# EAGLE board driver ckt_4_HC (EAGLE 8.4.3)
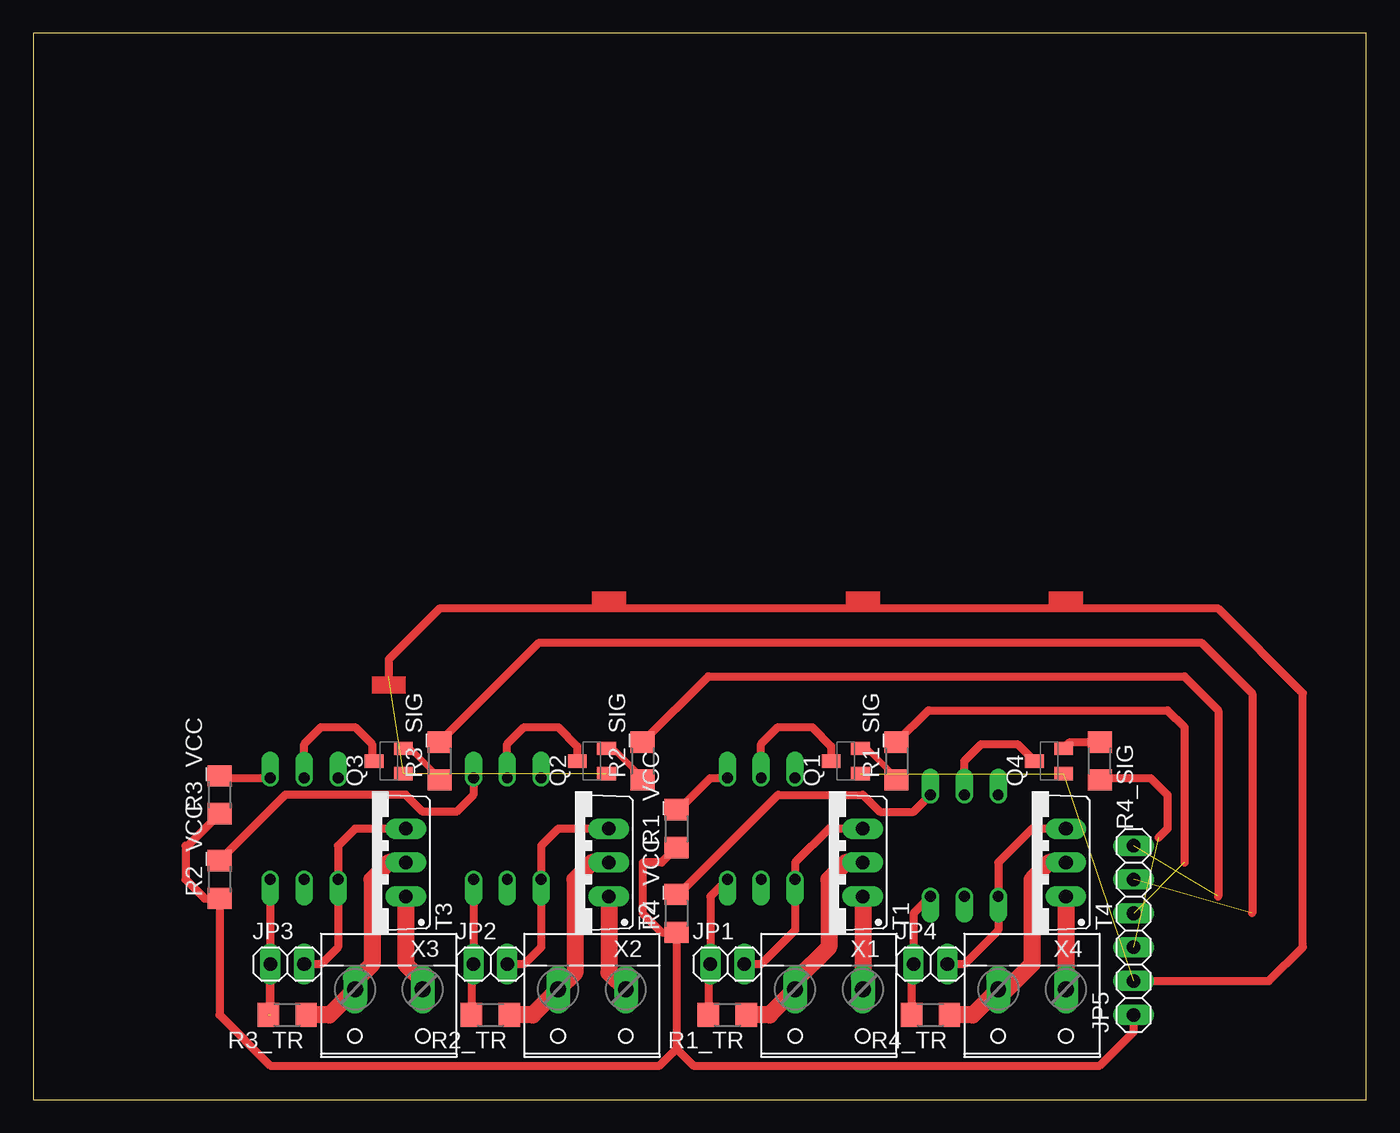
[diagram p0: board, top side]
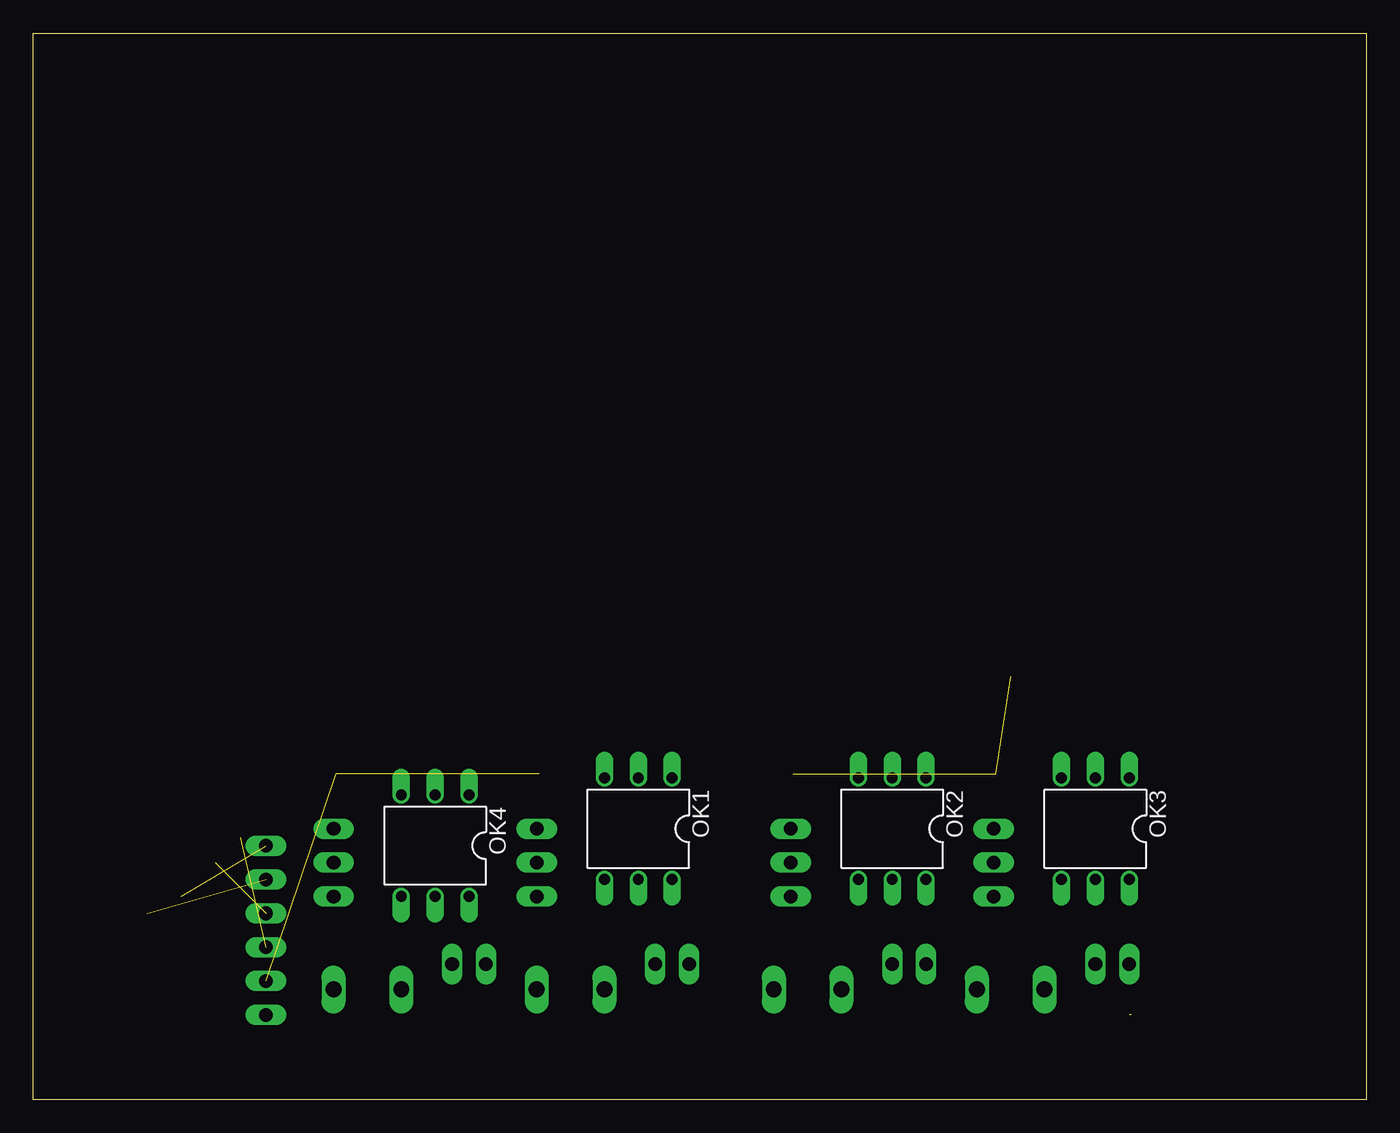
[diagram p1: board, bottom side, seen from below]

Size 100 x 80 mm. Coordinates in mm from the lower left corner, seen from the top.
Outline: 0,0 100,0 100,80 0,80 0,0
Copper layers (1*16): Top 0.035mm / dielectric 1.5mm / Bottom 0.035mm
Design rules "default": minimum track width 6mil, minimum drill 0.35mm, track to track 6mil, track to pad 6mil, pad to pad 6mil, via to via 6mil, smd to smd 6mil, copper to edge 40mil, drill to drill 6mil, minimum pad ring 10mil, minimum via ring 8mil, stop-mask expansion 4mil, vias tented up to drill 0mil, thermal gap 10mil

## Footprints (pad centres in the part's own frame; a part is rotated, then mirrored left to right if it is on the bottom)
1X02 = drill 1.016 long: 1 -1.27,0; 2 1.27,0
1X06 = drill 1.016 long: 1 -6.35,0; 2 -3.81,0; 3 -1.27,0; 4 1.27,0; 5 3.81,0; 6 6.35,0
DIL06 = drill 0.813 offset: 1 -2.54,-3.81; 2 0,-3.81; 3 2.54,-3.81; 4 2.54,3.81; 5 0,3.81; 6 -2.54,3.81
SOT23-EBC = smd 1 x 1.4: B 0.95,-1.1; C 0,1.1; E -0.95,-1.1
R1206 = smd 1.6 x 1.803: 1 -1.422,0; 2 1.422,0
TO220BV = drill 1.016 long: G 2.54,-2.54; T1 -2.54,-2.54; T2 0,-2.54
W237-132 = drill 1.194 long: 1 -2.54,-0.635; 2 2.54,-0.635

## Placement (x,y rotation side)
JP1  [1X02]  52.07,10.16 0 top
JP2  [1X02]  34.29,10.16 0 top
JP3  [1X02]  19.05,10.16 0 top
JP4  [1X02]  67.31,10.16 0 top
JP5  [1X06]  82.55,12.7 90 top
OK1  MOC3021M  [DIL06]  54.61,20.32 180 bottom
OK2  MOC3021M  [DIL06]  35.56,20.32 180 bottom
OK3  MOC3021M  [DIL06]  20.32,20.32 180 bottom
OK4  MOC3021M  [DIL06]  69.85,19.05 180 bottom
Q1  [SOT23-EBC]  60.96,25.4 90 top
Q2  [SOT23-EBC]  41.91,25.4 90 top
Q3  [SOT23-EBC]  26.67,25.4 90 top
Q4  [SOT23-EBC]  76.2,25.4 90 top
R1_SIG  [R1206]  64.77,25.4 90 top
R1_TR  [R1206]  52.07,6.35 180 top
R1_VCC  [R1206]  48.26,20.32 90 top
R2_SIG  [R1206]  45.72,25.4 90 top
R2_TR  [R1206]  34.29,6.35 180 top
R2_VCC  [R1206]  13.97,16.51 90 top
R3_SIG  [R1206]  30.48,25.4 90 top
R3_TR  [R1206]  19.05,6.35 180 top
R3_VCC  [R1206]  13.97,22.86 90 top
R4_SIG  [R1206]  80.01,25.4 270 top
R4_TR  [R1206]  67.31,6.35 180 top
R4_VCC  [R1206]  48.26,13.97 90 top
T1  BT138-V  [TO220BV]  59.69,17.78 90 top
T2  BT138-V  [TO220BV]  40.64,17.78 90 top
T3  BT138-V  [TO220BV]  25.4,17.78 90 top
T4  BT138-V  [TO220BV]  74.93,17.78 90 top
X1  [W237-132]  59.69,7.62 180 top
X2  [W237-132]  41.91,7.62 180 top
X3  [W237-132]  26.67,7.62 180 top
X4  [W237-132]  74.93,7.62 180 top

## Library data of the parts
JP1-JP5 = pinhead
OK1-OK4 = optocoupler; MF: FAIRCHILD SEMICONDUCTOR; MPN: MOC3021-M; OC_FARNELL: 1021365; OC_NEWARK: 95B7895
Q1-Q4 = transistor
R1_SIG R1_TR R1_VCC R2_SIG R2_TR R2_VCC R3_SIG R3_TR R3_VCC R4_SIG R4_TR R4_VCC = eagle-ltspice; SPICEMODEL: NONE; SPICEPREFIX: R
T1-T4 = triac
X1-X4 = con-wago-508; OC_FARNELL: unknown; OC_NEWARK: unknown

## Nets
+5V: JP5.1 R1_VCC.1 R2_VCC.1 R3_VCC.1 R4_VCC.1
IN1: JP5.4 R1_SIG.2
IN2: JP5.6 R2_SIG.2
IN3: JP5.5 R3_SIG.2
IN4: JP5.3 R4_SIG.2
N$1: JP1.1 OK1.6 R1_TR.2
N$2: R1_TR.1 T1.T2 X1.2
N$3: T1.T1 X1.1
N$4: OK1.1 R1_VCC.2
N$5: OK1.2 Q1.C
N$6: JP2.2 OK2.4 T2.G
N$7: JP1.2 OK1.4 T1.G
N$8: JP2.1 OK2.6 R2_TR.2
N$9: Q1.B R1_SIG.1
N$10: R2_TR.1 T2.T2 X2.2
N$11: Q2.B R2_SIG.1
N$12: T2.T1 X2.1
N$13: OK2.1 R2_VCC.2
N$14: OK2.2 Q2.C
N$15: JP3.2 OK3.4 T3.G
N$16: JP3.1 OK3.6 R3_TR.2
N$17: R3_TR.1 T3.T2 X3.2
N$18: Q3.B R3_SIG.1
N$19: T3.T1 X3.1
N$20: OK3.1 R3_VCC.2
N$21: OK3.2 Q3.C
N$22: JP4.2 OK4.4 T4.G
N$23: JP4.1 OK4.6 R4_TR.2
N$24: R4_TR.1 T4.T2 X4.2
N$25: Q4.B R4_SIG.1
N$26: T4.T1 X4.1
N$27: OK4.1 R4_VCC.2
N$28: OK4.2 Q4.C
PE: JP5.2 Q1.E Q2.E Q3.E Q4.E

## Tracks (layer width: path | path; a pad name or v marks a point on that pad's centre or on a via)
+5V
  Top 0.61: R3_VCC.1 11.58,19.05 11.43,19.05 11.43,16.51 12.85,15.09 R2_VCC.1 13.97,6.35 17.78,2.54 46.99,2.54 48.26,3.81 | R1_VCC.1 47.14,17.78 45.72,17.78 45.72,13.97 47.14,12.55 R4_VCC.1 48.26,3.81 | 48.26,3.81 49.53,2.54 80.01,2.54 82.55,5.08 JP5.1
IN1  (1 unrouted)
  Top 0.61: R1_SIG.2 67.16,29.21 85.09,29.21 86.36,27.94 86.36,17.78
IN2  (1 unrouted)
  Top 0.61: R2_SIG.2 50.65,31.75 86.36,31.75 88.9,29.21 88.9,15.24
IN3  (1 unrouted)
  Top 0.61: R3_SIG.2 37.95,34.29 87.63,34.29 91.44,30.48 91.44,13.97
IN4  (1 unrouted)
  Top 0.61: R4_SIG.2 80.16,24.13 83.82,24.13 85.09,22.86 85.09,20.32 84.43,19.66
N$1
  Top 0.61: OK1.6 50.8,15.24 JP1.1 50.65,10.01 R1_TR.2
N$2
  Top 1.27: T1.T2 60.96,17.78 59.69,16.51 59.69,11.43 57.15,8.89 X1.2 55.24,6.35 R1_TR.1
N$3
  Top 1.27: T1.T1 X1.1
N$4
  Top 0.61: R1_VCC.2 48.41,21.74 50.8,24.13 OK1.1
N$5
  Top 0.61: OK1.2 54.61,26.67 55.88,27.94 58.42,27.94 59.86,26.5 Q1.C
N$6
  Top 0.61: T2.G 39.37,20.32 38.1,19.05 OK2.4 38.1,11.43 36.83,10.16 JP2.2
N$7
  Top 0.61: T1.G 59.69,20.32 57.15,17.78 OK1.4 | OK1.4 57.15,13.97 | OK1.4 57.15,12.7 54.61,10.16 JP1.2
N$8
  Top 0.61: OK2.6 JP2.1 32.87,10.01 R2_TR.2
N$9
  Top 0.406: Q1.B 62.55,26.35 64.77,24.13
  Top 0.61: 64.77,24.13 R1_SIG.1
N$10
  Top 1.27: T2.T2 41.91,17.78 40.64,16.51 40.64,9.53 X2.2 37.47,6.35 R2_TR.1
N$11
  Top 0.406: Q2.B 43.5,26.35 45.72,24.13
  Top 0.61: 45.72,24.13 R2_SIG.1
N$12
  Top 1.27: X2.1 43.18,9.53 T2.T1
N$13
  Top 0.61: R2_VCC.2 18.9,22.86 27.94,22.86 29.21,21.59 31.75,21.59 33.02,22.86 OK2.1
N$14
  Top 0.61: OK2.2 35.56,26.67 36.83,27.94 39.37,27.94 40.81,26.5 Q2.C
N$15
  Top 0.61: T3.G 24.13,20.32 22.86,19.05 OK3.4 22.86,11.43 21.59,10.16 JP3.2
N$16  (1 unrouted)
  Top 0.61: OK3.6 JP3.1 | JP3.1 17.78,6.35 JP3.1
N$17
  Top 1.27: T3.T2 26.67,17.78 25.4,16.51 25.4,10.16 24.13,8.89 X3.2 22.23,6.35 R3_TR.1 | R3_TR.1 20.32,6.35 R3_TR.1
N$18
  Top 0.406: Q3.B 28.26,26.35 30.48,24.13
  Top 0.61: 30.48,24.13 R3_SIG.1
N$19
  Top 1.27: T3.T1 27.94,10.16 29.21,8.89 X3.1
N$20
  Top 0.61: R3_VCC.2 14.12,24.13 OK3.1
N$21
  Top 0.61: OK3.2 20.32,26.67 21.59,27.94 24.13,27.94 25.4,26.67 25.4,25.57 Q3.C
N$22
  Top 0.61: T4.G 74.93,20.32 72.39,17.78 OK4.4 72.39,12.7 69.85,10.16 JP4.2
N$23
  Top 0.61: OK4.6 66.04,13.97 JP4.1 65.89,10.01 R4_TR.2
N$24
  Top 1.27: T4.T2 76.2,17.78 74.93,16.51 74.93,10.16 73.03,8.26 X4.2 70.48,6.35 R4_TR.1
N$25
  Top 0.61: Q4.B 77.77,26.82 R4_SIG.1
N$26
  Top 1.27: T4.T1 X4.1
N$27
  Top 0.61: R4_VCC.2 48.41,15.39 55.88,22.86 62.23,22.86 63.5,21.59 66.04,21.59 OK4.1
N$28
  Top 0.61: OK4.2 69.85,25.4 71.12,26.67 73.83,26.67 Q4.C
PE  (4 unrouted)
  Top 0.61: JP5.2 92.71,8.89 95.25,11.43 95.25,30.48 88.9,36.83 30.48,36.83 26.67,33.02 26.67,31.75
(copper drawn outside any net)
  shapes: Top area x4